# EAGLE board twister (EAGLE 6.4)
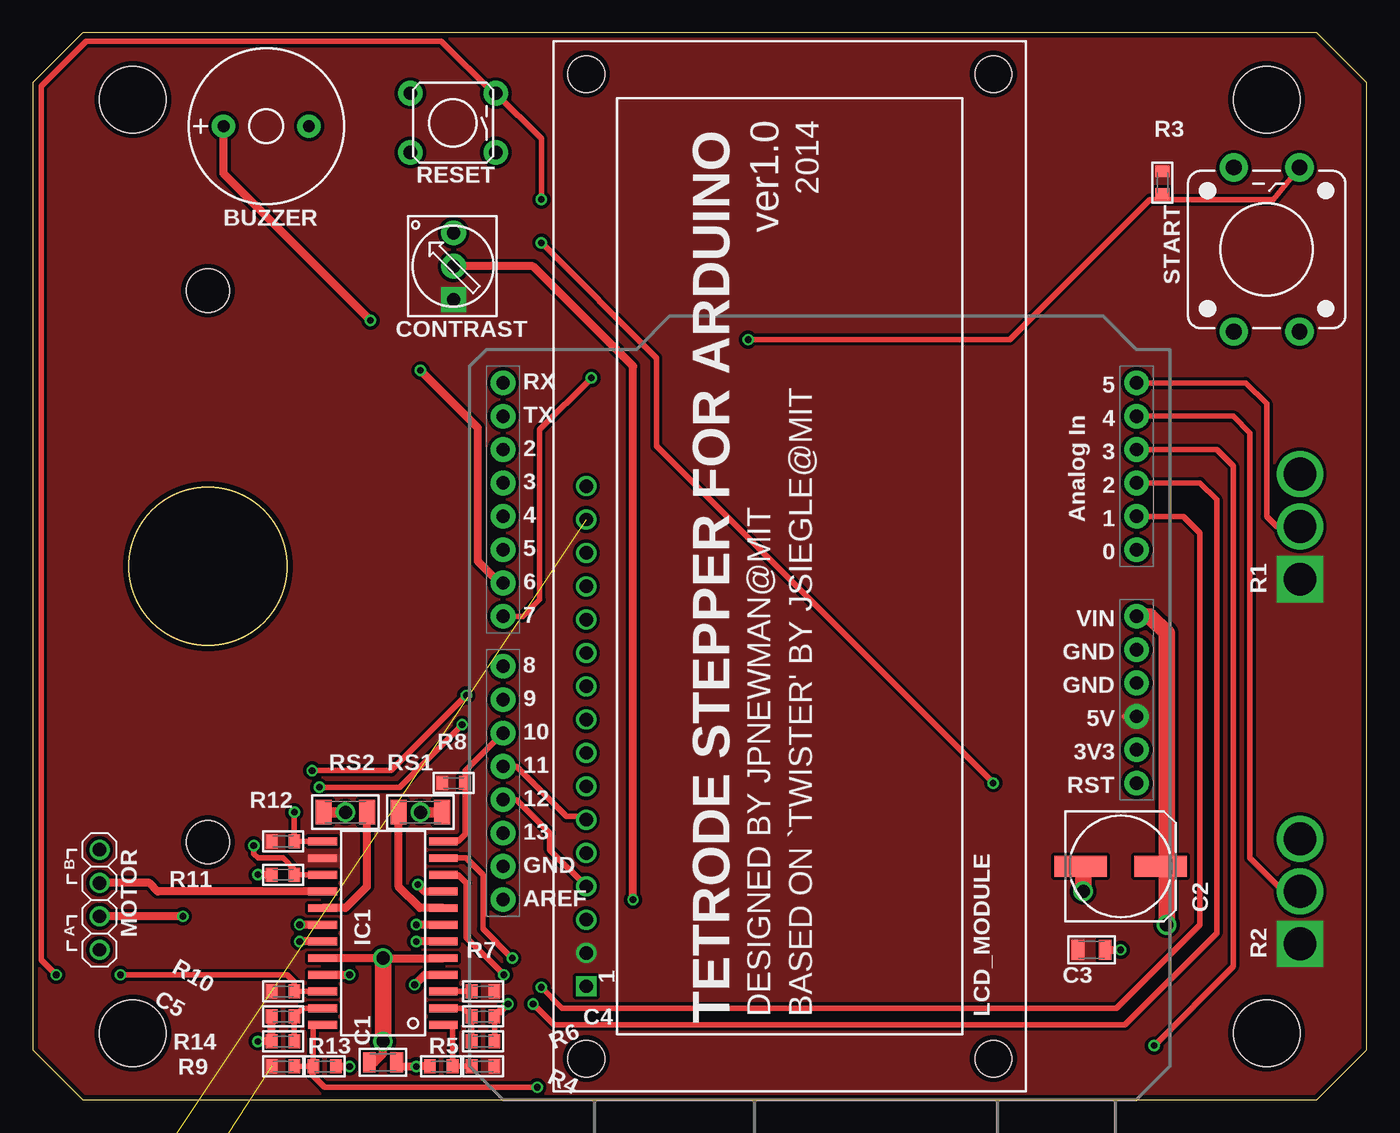
[diagram p0: board, top side]
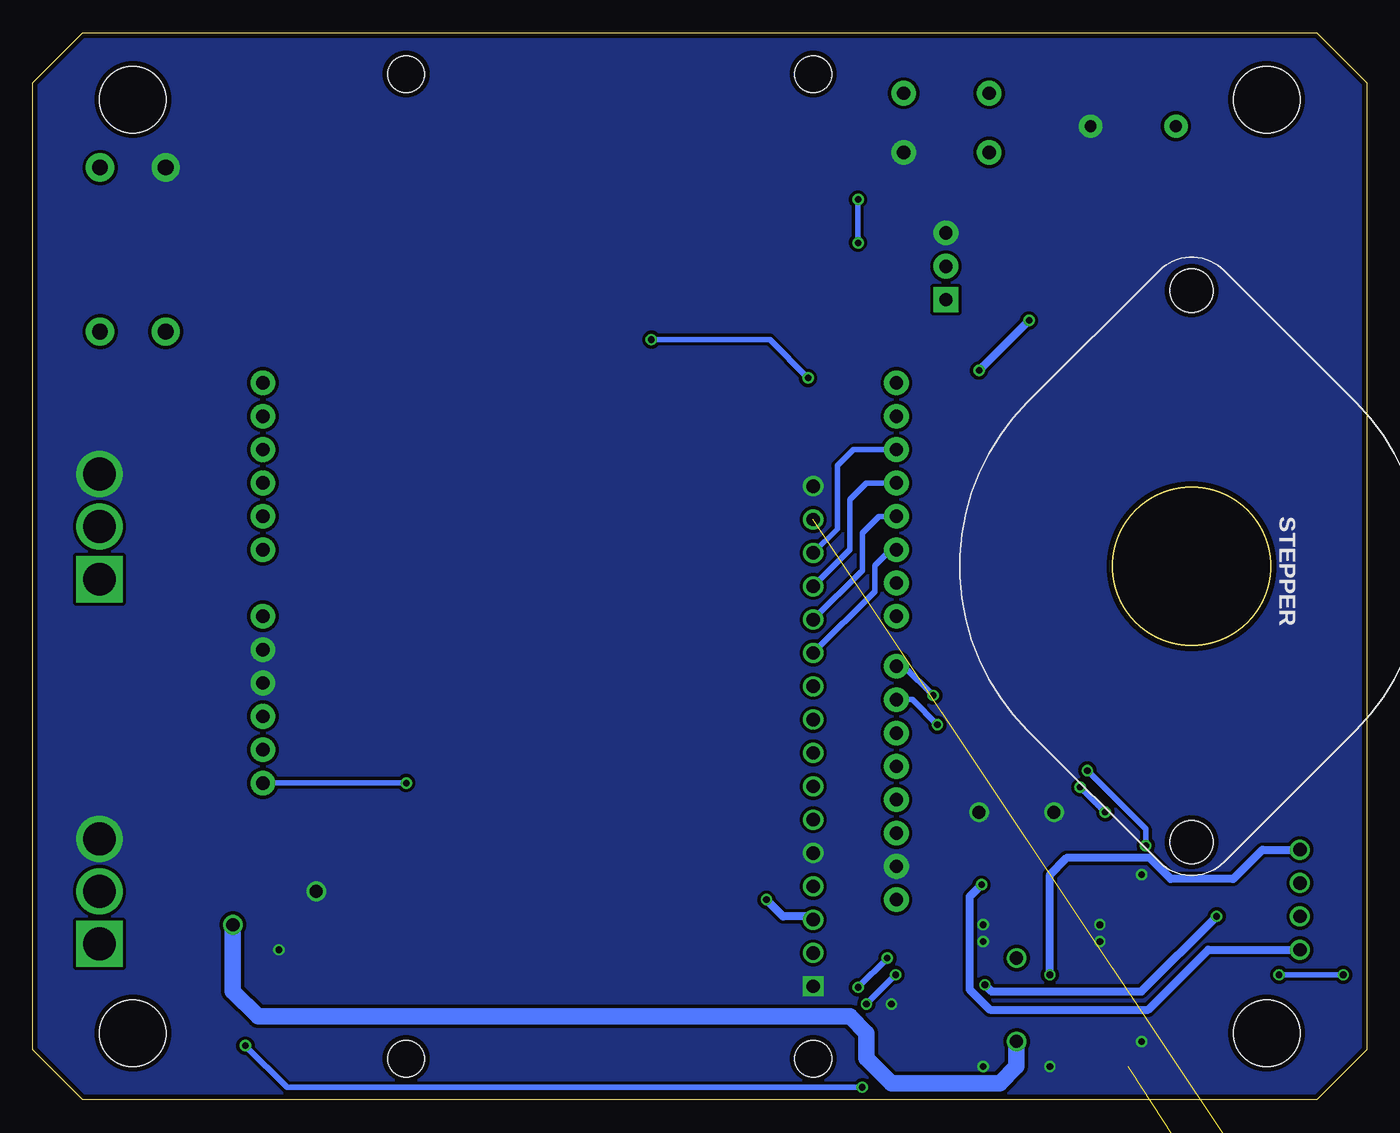
[diagram p1: board, bottom side, seen from below]

Size 101.6 x 81.28 mm. Coordinates in mm from the lower left corner, seen from the top.
Outline: 101.6,3.81 97.79,0 3.81,0 0,3.81 0,77.47 3.81,81.28 97.79,81.28 101.6,77.47
Outline: 101.6,3.81 101.6,3.81
Outline: 101.6,3.81 101.6,77.47
Outline: 101.6,77.47 101.6,77.47
Copper layers (1*16): Top 0.0356mm / dielectric 1.5011mm / Bottom 0.0356mm
Design rules "ohs-park-2-layer *": minimum track width 6mil, minimum drill 13mil, track to track 6mil, track to pad 6mil, pad to pad 6mil, via to via 6mil, smd to smd 6mil, copper to edge 15mil, drill to drill 6mil, minimum pad ring 7mil, minimum via ring 7mil, stop-mask expansion 4mil, vias tented up to drill 100mil, thermal gap 10mil
Holes 5.08 mm at 7.62,76.2 93.98,76.2 93.98,5.08 7.62,5.08
bRestrict: area 0.6,-19.8 to 1.9,-18.3

## Footprints (pad centres in the part's own frame; a part is rotated, then mirrored left to right if it is on the bottom)
BUZZER-12MM = drill 0.9 pad 1.778: + 3.25,0; - -3.25,0
0805 = smd 0.965 x 1.524: 1 -1.041,0; 2 1.041,0
153CLV-0807 = smd 4 x 1.6: + 3.05,0; - -3.05,0
0603 = smd 0.889 x 1.067: 1 -0.864,0; 2 0.864,0
3362U-2 = drill 1.016 pad 1.88 square: 1 -2.54,-0.305 | drill 1.016 pad 1.88: 2 0,-0.305; 3 2.54,-0.305
SMB = smd 2.4 x 2.4: A 2.2,0; C -2.2,0
SO24W = smd 0.6 x 2.2: 1 -6.985,-4.6; 2 -5.715,-4.6; 3 -4.445,-4.6; 4 -3.175,-4.6; 5 -1.905,-4.6; 6 -0.635,-4.6; 7 0.635,-4.6; 8 1.905,-4.6; 9 3.175,-4.6; 10 4.445,-4.6; 11 5.715,-4.6; 12 6.985,-4.6; 13 6.985,4.6; 14 5.715,4.6; 15 4.445,4.6; 16 3.175,4.6; 17 1.905,4.6; 18 0.635,4.6; 19 -0.635,4.6; 20 -1.905,4.6; 21 -3.175,4.6; 22 -4.445,4.6; 23 -5.715,4.6; 24 -6.985,4.6
LCD-16X2 = drill 1.016 square: 1 -32,15.5 | drill 1.016: 2 -29.46,15.5; 3 -26.92,15.5; 4 -24.38,15.5; 5 -21.84,15.5; 6 -19.3,15.5; 7 -16.76,15.5; 8 -14.22,15.5; 9 -11.68,15.5; 10 -9.14,15.5; 11 -6.6,15.5; 12 -4.06,15.5; 13 -1.52,15.5; 14 1.02,15.5; 15 3.56,15.5; 16 6.1,15.5 | hole 2.8: -37.5,15.5; -37.5,-15.5; 37.5,15.5; 37.5,-15.5
1X04 = drill 1.016: 1 0,0; 2 2.54,0; 3 5.08,0; 4 7.62,0
LARGE_POT = drill 2.5 pad 3: CENTER 0,0; RIGHT 4,0 | drill 2.5 pad 3 square: LEFT -4,0
TACTILE-PTH = drill 1.016 pad 1.88: 1 -3.251,2.261; 2 3.251,2.261; 3 -3.251,-2.261; 4 3.251,-2.261
1206 = smd 1.219 x 1.88: 1 -1.651,0; 2 1.651,0
TACTILE-PTH-12MM = drill 1.2 pad 2.159: 1 6.25,-2.5; 2 -6.25,-2.5; 3 6.25,2.5; 4 -6.25,2.5
ST-PM35-15-11C = hole 3.3: -21,0; 21,0
DUEMILANOVE_SHIELD_NOHOLES = drill 1.016 pad 1.88: 3.3V 50.8,26.67; 5V 50.8,29.21; A0 50.8,41.91; A1 50.8,44.45; A2 50.8,46.99; A3 50.8,49.53; A4 50.8,52.07; A5 50.8,54.61; AREF 2.54,15.24; D2 2.54,49.53; D3 2.54,46.99; D4 2.54,44.45; D5 2.54,41.91; D6 2.54,39.37; D7 2.54,36.83; D8 2.54,33.02; D9 2.54,30.48; D10 2.54,27.94; D11 2.54,25.4; D12 2.54,22.86; D13 2.54,20.32; GND@0 50.8,31.75; GND@1 50.8,34.29; GND@2 2.54,17.78; RES 50.8,24.13; RX 2.54,54.61; TX 2.54,52.07; VIN 50.8,36.83

## Placement (x,y rotation side)
BUZZER  SG1  [BUZZER-12MM]  17.78,74.17 0 top
C1  1uF  [0805]  26.67,2.86 0 top
C2  47uF  [153CLV-0807]  82.87,17.78 0 top
C3  1uF  [0805]  80.64,11.43 0 top
C4  680pF  [0603]  34.29,6.35 0 top
C5  680pF  [0603]  19.05,6.35 180 top
CONTRAST  10k  [3362U-2]  31.75,63.5 90 top
D1  DIODE_SMB  [SMB]  -1.27,-24.13 0 top  (outside the outline)
IC1  A3967SLB  [SO24W]  26.67,12.7 90 top
LCD_MODULE  LCD-16X2  [LCD-16X2]  57.66,40.64 90 top
MOTOR  PINHD-1X4  [1X04]  5.08,11.43 90 top
R1  R12-0  [LARGE_POT]  96.52,43.66 90 top
R2  R12-0  [LARGE_POT]  96.52,15.88 90 top
R3  10K  [0603]  86.04,69.85 270 top
R4  11K  [0603]  34.29,2.54 180 top
R5  10K  [0603]  31.11,2.54 180 top
R6  20K  [0603]  34.29,4.45 180 top
R7  10K  [0603]  34.29,8.26 0 top
R8  10K  [0603]  32.07,24.13 180 top
R9  10K  [0603]  19.05,2.54 180 top
R10  10K  [0603]  19.05,8.26 180 top
R11  10K  [0603]  19.05,17.14 0 top
R12  10K  [0603]  19.05,19.68 180 top
R13  ???  [0603]  22.23,2.54 180 top
R14  20K  [0603]  19.05,4.45 0 top
RESET  2PTH  [TACTILE-PTH]  32,74.42 180 top
RS1  .75  [1206]  29.53,21.91 180 top
RS2  .75  [1206]  23.81,21.91 0 top
START  212MM  [TACTILE-PTH-12MM]  93.98,64.77 90 top
STEPPER  ST-PM35  [ST-PM35-15-11C]  13.34,40.64 90 bottom
U1  ARDUINO_SHIELDNOHOLES  [DUEMILANOVE_SHIELD_NOHOLES]  33.27,0 0 top

## Library data of the parts
BUZZER C4 C5 CONTRAST D1 IC1 LCD_MODULE MOTOR R1 R2 RESET RS1 RS2 START U1 = twister_clean
C1 C3 = twister_clean; MN: TDK Corp.; PARTNO: C2012X5R1Cxxxxxxx; VID: DK
C2 = cyclops
R3-R14 = twister_clean; DK: PxxxxHTR-ND; MN: Panasonic; MPN: ERJ-3EKFxxxxV
STEPPER = twister

## Nets
+5V: C3.1 CONTRAST.1 D1.A IC1.14 LCD_MODULE.2 R1.LEFT R2.LEFT R3.1 R4.1 R7.2 R8.2 R9.2 R10.2 R12.2 U1.5V
A: D1.C LCD_MODULE.15
D6: BUZZER.- U1.D6
DIR: IC1.11 U1.A1
ENABLE: IC1.15 R11.2 U1.D8
GND: BUZZER.+ C1.2 C2.- C3.2 C4.2 C5.2 CONTRAST.3 IC1.6 IC1.7 IC1.18 IC1.19 LCD_MODULE.1 LCD_MODULE.5 LCD_MODULE.16 R1.RIGHT R2.RIGHT R5.2 R6.1 R11.1 R13.1 R14.1 RESET.1 RS1.1 RS2.1 START.3 U1.GND@0 U1.GND@1 U1.GND@2
MS1: IC1.12 R8.1 U1.D10
MS2: IC1.13 R12.1 U1.D9
N$1: IC1.8 RS1.2
N$2: C4.1 IC1.2 R6.2
N$3: IC1.17 RS2.2
N$4: LCD_MODULE.4 U1.D12
N$5: LCD_MODULE.6 U1.D11
N$6: LCD_MODULE.11 U1.D5
N$7: LCD_MODULE.12 U1.D4
N$8: LCD_MODULE.13 U1.D3
N$9: LCD_MODULE.14 U1.D2
N$10: R2.CENTER U1.A4
N$11: R1.CENTER U1.A5
N$12: R3.2 START.1 U1.D7
N$13: C5.1 IC1.23 R14.2
N$14: IC1.1 R4.2 R5.1
OUT1A: IC1.16 MOTOR.3
OUT1B: IC1.21 MOTOR.4
OUT2A: IC1.9 MOTOR.1
OUT2B: IC1.4 MOTOR.2
PFD: IC1.24 R9.1 R13.2 U1.A3
RESET: IC1.22 R10.1 RESET.3 U1.RES
SLEEP: IC1.3 R7.1
STEP: IC1.10 U1.A2
VIN: C1.1 C2.+ IC1.5 IC1.20 U1.VIN
VO: CONTRAST.2 LCD_MODULE.3

## Tracks (layer width: path | path; a pad name or v marks a point on that pad's centre or on a via)
+5V  (1 unrouted)
  Top 0.406: U1.5V 83.16,29.21
  pour Top (isolate 0.254, no thermals): 0,77.22 0,51.82 0,29.46 0,3.81 0,3.3 3.81,-0.51 97.79,-0.51 101.85,3.56 101.85,77.22 97.54,81.53 4.06,81.53 3.81,81.28
A  (1 unrouted)
D6  (via drill 0.51)
  Top 0.61: BUZZER.- 14.53,70.56 v25.72,59.37 | U1.D6 35.56,39.37 33.91,41.02 33.91,51.18 v29.53,55.56
  Bottom 0.61: v29.53,55.56 v25.72,59.37
DIR  (via drill 0.51)
  Top 0.406: U1.A1 87.63,44.45 88.9,43.18 88.9,13.34 82.55,6.99 40.32,6.99 v38.73,8.57 | IC1.11 33.02,18.41 34.29,17.14 34.29,13.02 v36.51,10.79
  Bottom 0.406: v38.73,8.57 v36.51,10.79
ENABLE  (via drill 0.51)
  Top 0.406: v16.83,19.37 16.83,18.73 17.14,18.41 19.05,18.41 19.91,17.55 R11.2 IC1.15 | v33.02,30.8 27.3,25.08 v21.27,25.08
  Bottom 0.406: v21.27,25.08 16.83,20.64 v16.83,19.37 | v33.02,30.8 35.24,33.02 U1.D8
GND  (via drill 0.51, 1)
  Top 0.406: R6.1 C4.2
  Top 0.61: IC1.18 v20.32,13.34 | IC1.19 v20.32,12.06 | IC1.7 v29.21,13.34 | IC1.6 v29.21,12.06 | v17.14,4.45 R14.1 C5.2 | R13.1 v24.13,2.54 | R11.1 v17.14,17.14 | v36.2,7.3 C4.2 | C3.2 v82.87,11.43 | R5.2 v29.21,2.54 28.03,2.54 C1.2
  Top 0.813: RS1.1 v29.53,21.91 | v23.81,21.91 RS2.1
  Top 1.27: v80.01,15.88 80.01,17.59 C2.-
  pour Bottom (isolate 0.254, no thermals): 0,77.22 0,51.82 0,29.46 0,3.3 3.81,-0.51 97.79,-0.51 101.85,3.56 101.85,77.22 97.54,81.53 4.06,81.53 3.81,81.28
MS1
  Top 0.406: U1.D10 32.93,25.06 R8.1 32.93,20.23 32.38,19.68 IC1.12
MS2  (via drill 0.51)
  Top 0.254: IC1.13 20.95,19.68
  Top 0.406: 20.95,19.68 R12.1 v19.91,21.91 | v32.7,28.57 27.94,23.81 v21.82,23.81
  Bottom 0.406: v21.82,23.81 v19.91,21.91 | v32.7,28.57 34.61,30.48 U1.D9
N$1
  Top 0.61: IC1.8 29.49,14.61 27.88,16.21 RS1.2
N$2
  Top 0.406: IC1.2 32.79,6.99 C4.1 R6.2
N$3
  Top 0.406: 25.15,21.72 RS2.2
  Top 0.61: IC1.17 23.81,14.61 25.46,16.26 RS2.2
N$4
  Top 0.406: LCD_MODULE.4 39.37,19.05 39.37,20.32 36.83,22.86 U1.D12
N$5
  Top 0.406: LCD_MODULE.6 41.91,21.59 40.64,21.59 36.83,25.4 U1.D11
N$6
  Bottom 0.406: U1.D5 36.25,41.91 37.47,40.69 37.47,38.73 LCD_MODULE.11
N$7
  Bottom 0.406: U1.D4 37.15,44.45 38.42,43.18 38.42,40.32 LCD_MODULE.12
N$8
  Bottom 0.406: 41.91,39.37 LCD_MODULE.13 39.37,41.91 39.37,45.72 38.1,46.99 U1.D3
N$9
  Bottom 0.406: U1.D2 39.11,49.53 40.32,48.31 40.32,43.49 LCD_MODULE.14
N$10
  Top 0.406: U1.A4 91.44,52.07 92.71,50.8 92.71,18.41 95.25,15.88 R2.CENTER
N$11
  Top 0.406: U1.A5 92.39,54.61 93.98,53.02 93.98,44.45 94.77,43.66 R1.CENTER
N$12  (via drill 0.51)
  Top 0.406: v42.55,54.99 38.61,51.05 38.61,38.1 37.34,36.83 U1.D7 | START.1 94.47,68.58 85.72,68.58 | 85.72,68.58 85.09,68.58 74.42,57.91 v54.48,57.91 | R3.2 86.04,68.9 85.72,68.58
  Bottom 0.406: v42.55,54.99 45.47,57.91 v54.48,57.91
N$13
  Top 0.406: IC1.23 20.55,6.99 C5.1 R14.2
N$14
  Top 0.406: IC1.1 32.07,5.71 31.98,5.63 R5.1 R4.2
OUT1A
  Top 0.406: IC1.16 22.07,15.97
  Top 0.61: IC1.16 9.53,15.88 8.89,16.51 MOTOR.3
OUT1B  (via drill 0.51)
  Top 0.61: 23.5,9.53 IC1.21 v24.13,9.53
  Bottom 0.61: v24.13,9.53 24.13,17.14 22.86,18.41 16.51,18.41 14.92,16.83 10.16,16.83 7.94,19.05 MOTOR.4
OUT2A  (via drill 0.51)
  Top 0.406: IC1.9 31.27,15.78
  Top 0.61: 31.37,15.88 IC1.9 29.84,15.88 v29.34,16.38
  Bottom 0.61: v29.34,16.38 30.23,15.49 30.23,8.39 29.34,7.5 29.34,7.49 28.7,6.86 16.64,6.86 12.06,11.43 MOTOR.1
OUT2B  (via drill 0.51)
  Top 0.61: v29.08,8.76 29.84,9.53 IC1.4 | v11.43,13.97 MOTOR.2
  Bottom 0.61: v29.08,8.76 28.57,8.26 17.14,8.26 v11.43,13.97
PFD  (via drill 0.51)
  Top 0.254: IC1.24 22.1,5.71 | 19.68,2.52 R9.1
  Top 0.406: 19.7,2.56 R9.1 R13.2 | U1.A3 90.17,49.53 91.44,48.26 91.44,10.16 v85.41,4.13 | R13.2 21.27,2.45 21.27,1.91 22.23,0.95 v38.42,0.95 | R13.2 21.36,5.63 21.27,5.71 IC1.24
  Bottom 0.406: v85.41,4.13 82.23,0.95 v38.42,0.95
RESET  (via drill 0.51)
  Top 0.406: v73.15,24.13 47.5,49.78 47.5,56.52 v38.73,65.28 | v1.78,9.53 0.64,10.67 0.64,77.21 4.07,80.64 31.11,80.64 35.08,76.68 RESET.3 38.73,73.2 v38.73,68.58 | IC1.22 R10.1 19.91,8.98 19.37,9.53 v6.67,9.53
  Bottom 0.406: v73.15,24.13 U1.RES | v38.73,65.28 v38.73,68.58 | v1.78,9.53 v6.67,9.53
SLEEP
  Top 0.305: IC1.3 31.24,8.26
  Top 0.406: IC1.3 R7.1
STEP  (via drill 0.51)
  Top 0.406: U1.A2 88.9,46.99 90.17,45.72 90.17,12.7 83.19,5.71 39.69,5.71 v38.1,7.3 | IC1.10 32.38,17.14 33.02,16.51 33.02,12.38 v35.88,9.53
  Bottom 0.406: v38.1,7.3 v35.88,9.53
VIN  (via drill 1)
  Top 0.61: IC1.20 v26.67,10.79 IC1.5 | C1.1 26.04,2.86 26.67,3.49 v26.67,4.45
  Top 1.27: v86.36,13.34 86.36,17.78 | 86.36,17.78 86.36,35.56 85.09,36.83 U1.VIN | C2.+ 86.36,17.78 | v26.67,10.79 v26.67,4.45
  Bottom 1.27: v86.36,13.34 86.36,8.26 84.45,6.35 39.37,6.35 38.1,5.08 38.1,3.17 36.2,1.27 27.94,1.27 26.67,2.54 v26.67,4.45
VO  (via drill 0.51)
  Top 0.61: v45.72,15.24 45.72,55.88 38.1,63.5 CONTRAST.2
  Bottom 0.61: v45.72,15.24 44.45,13.97 42.41,13.97 LCD_MODULE.3

## Text on the board
tPlace: ver1.0 | 2014 | B | A | TETRODE STEPPER FOR ARDUINO | DESIGNED BY JPNEWMAN@MIT | BASED ON `TWISTER' BY JSIEGLE@MIT